# Altium PCB mersad_allah_yari.PcbDoc
Units mm, origin at the board's own origin, x right, y up, seen from the top; angles counter-clockwise.
Board outline 96.65 x 64.52 mm, 2 copper layers (Top Layer, Bottom Layer); 28 components, 23 nets, 116 pads, 13 vias.
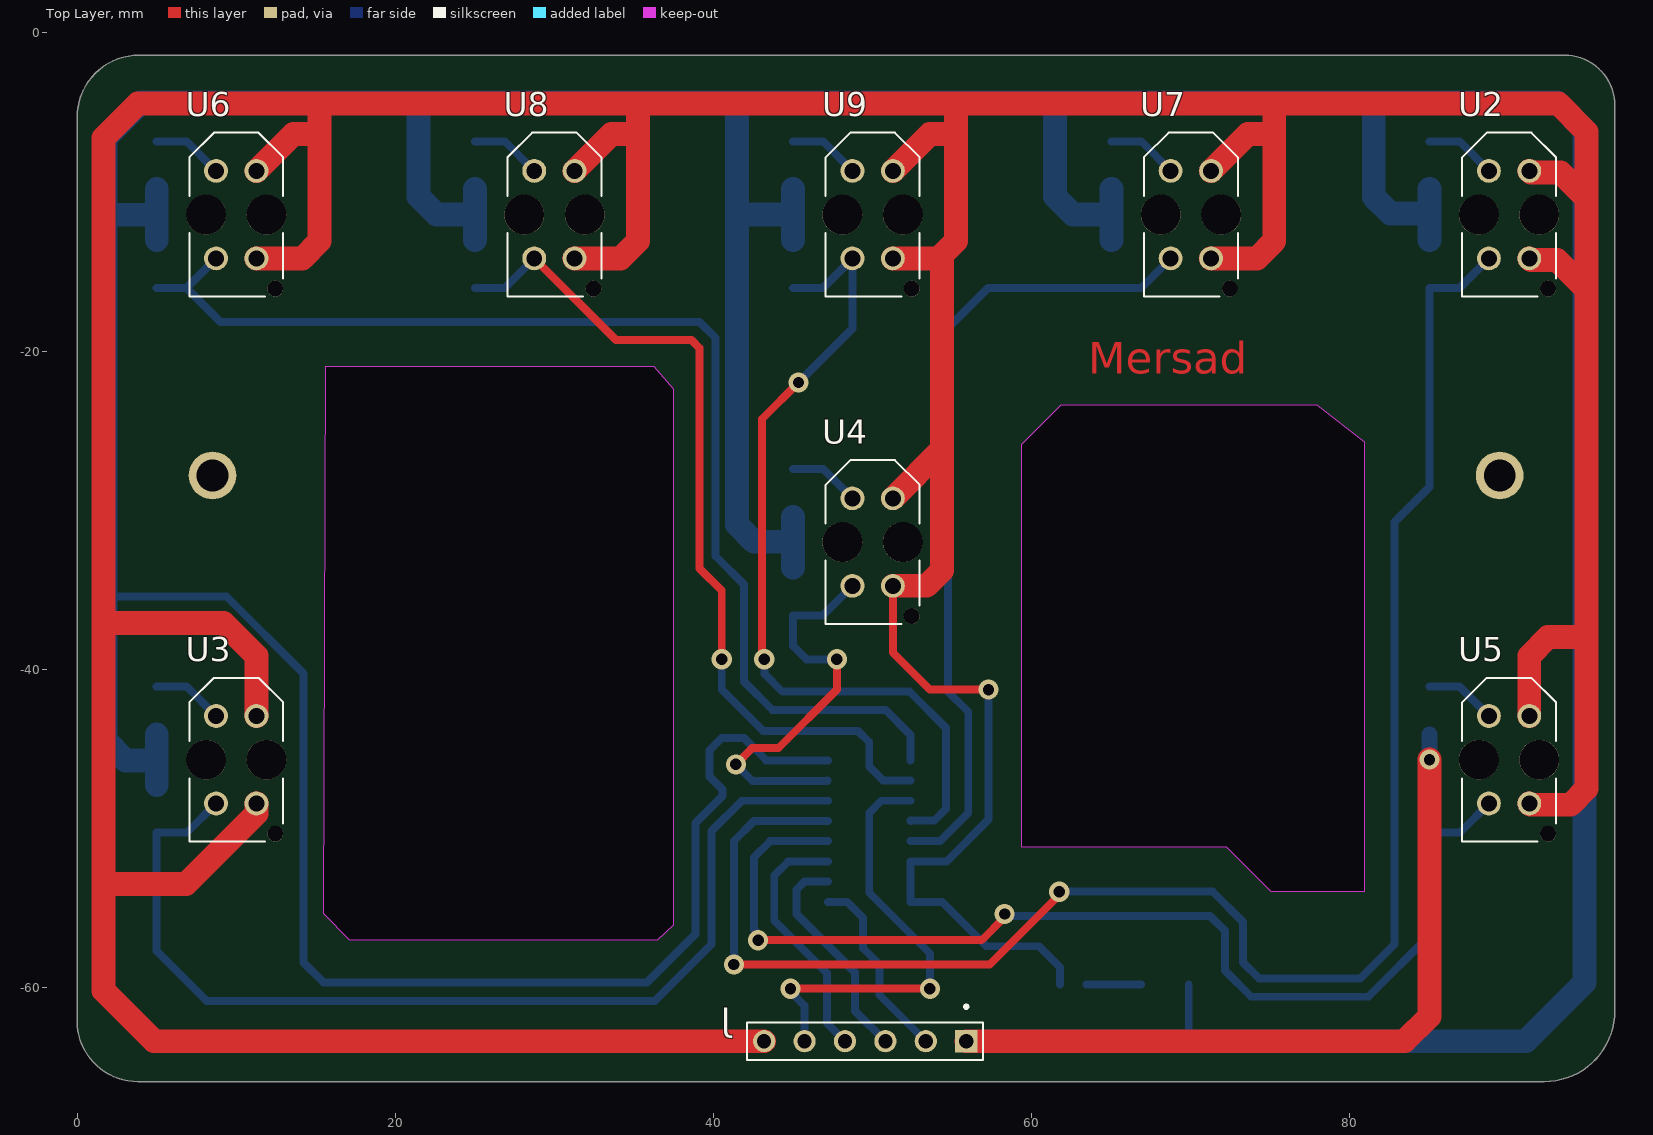
[diagram p0: Top Layer view]
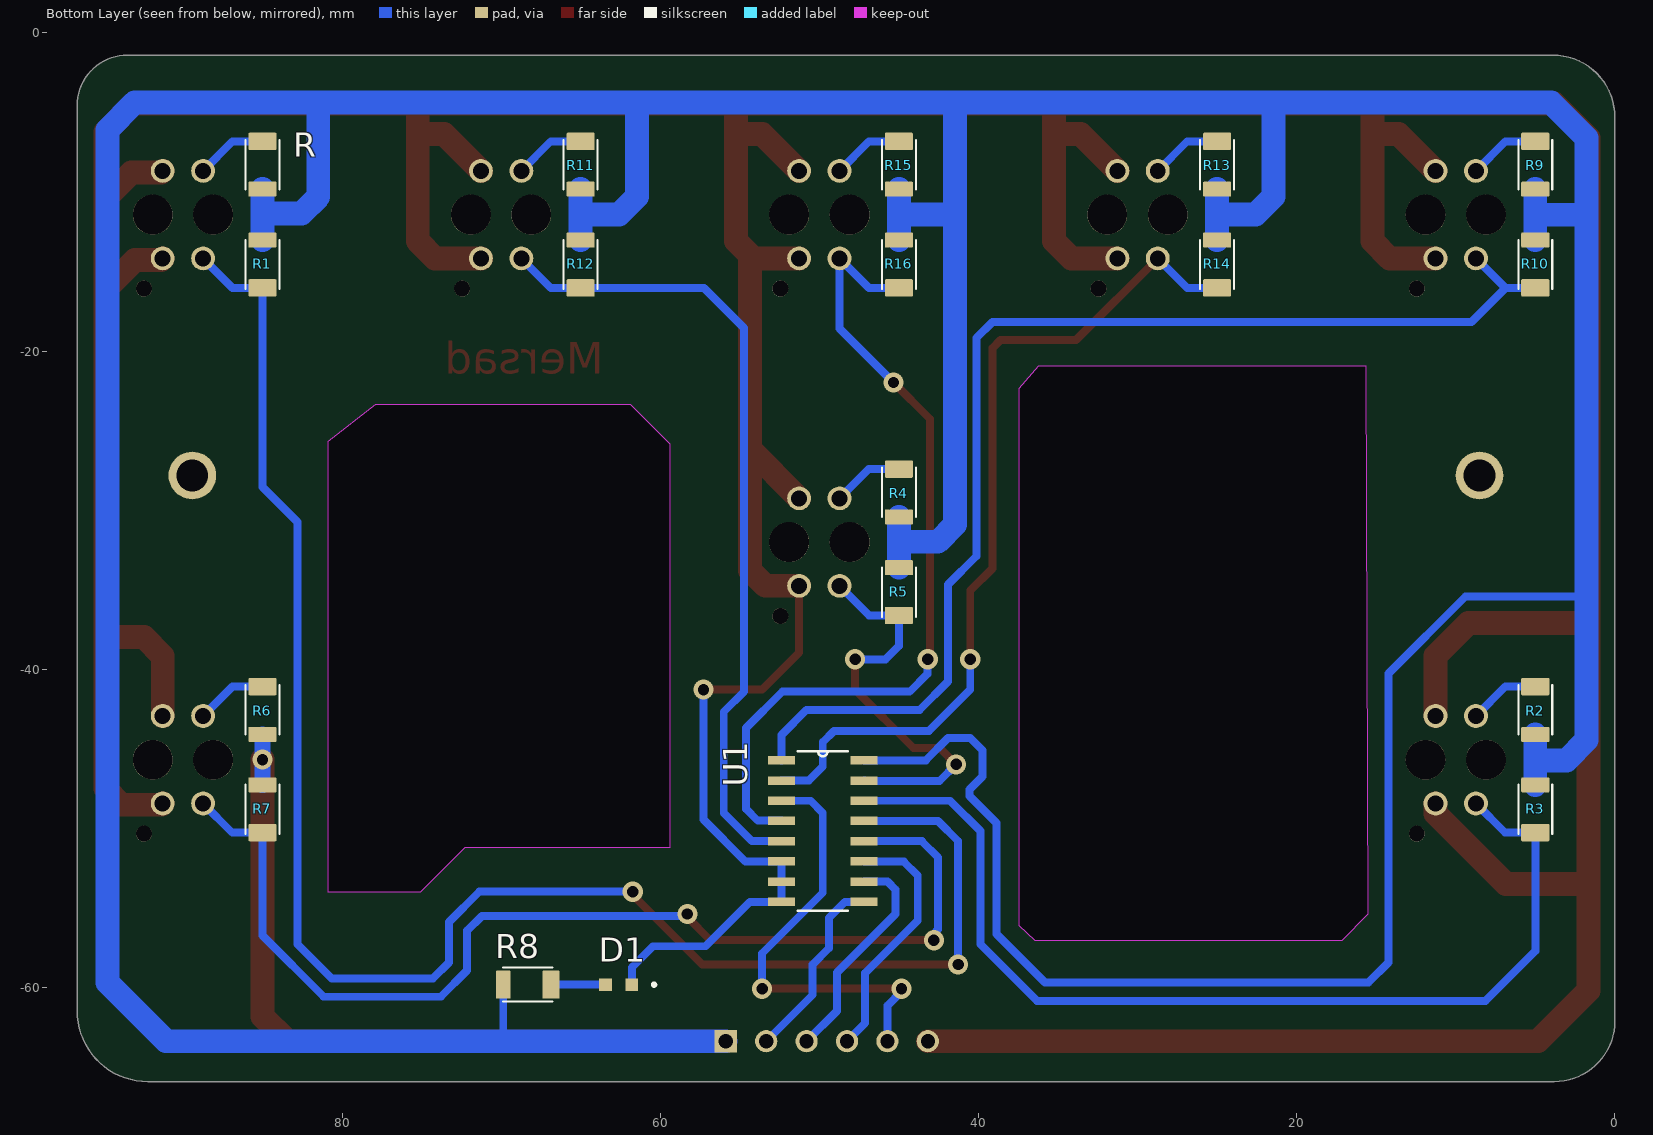
[diagram p1: Bottom Layer view, seen from below]
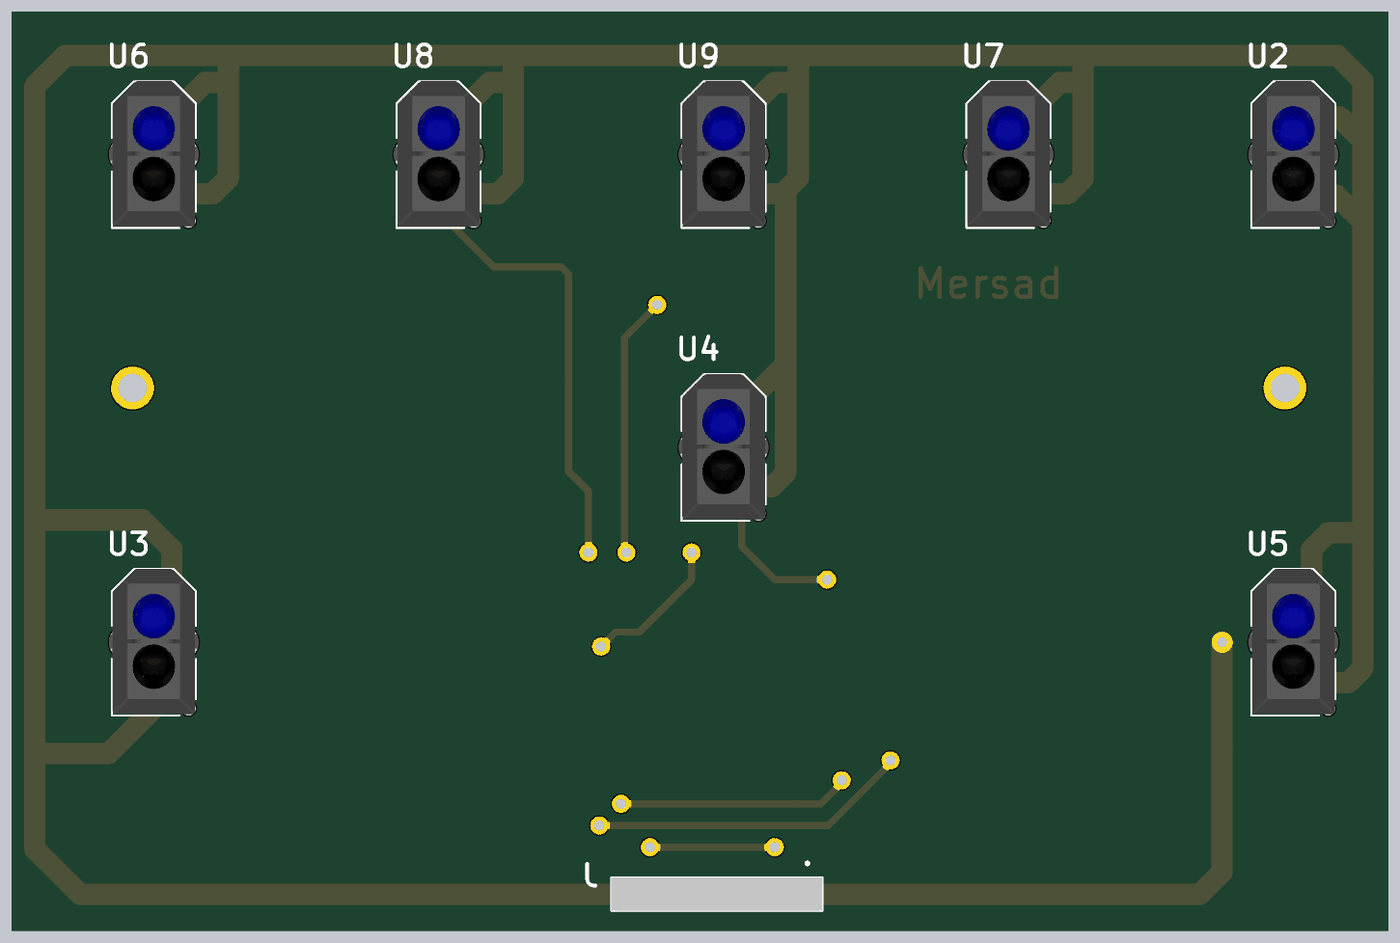
[diagram p2: 3D render of the assembled board from above, using the file's embedded part models]
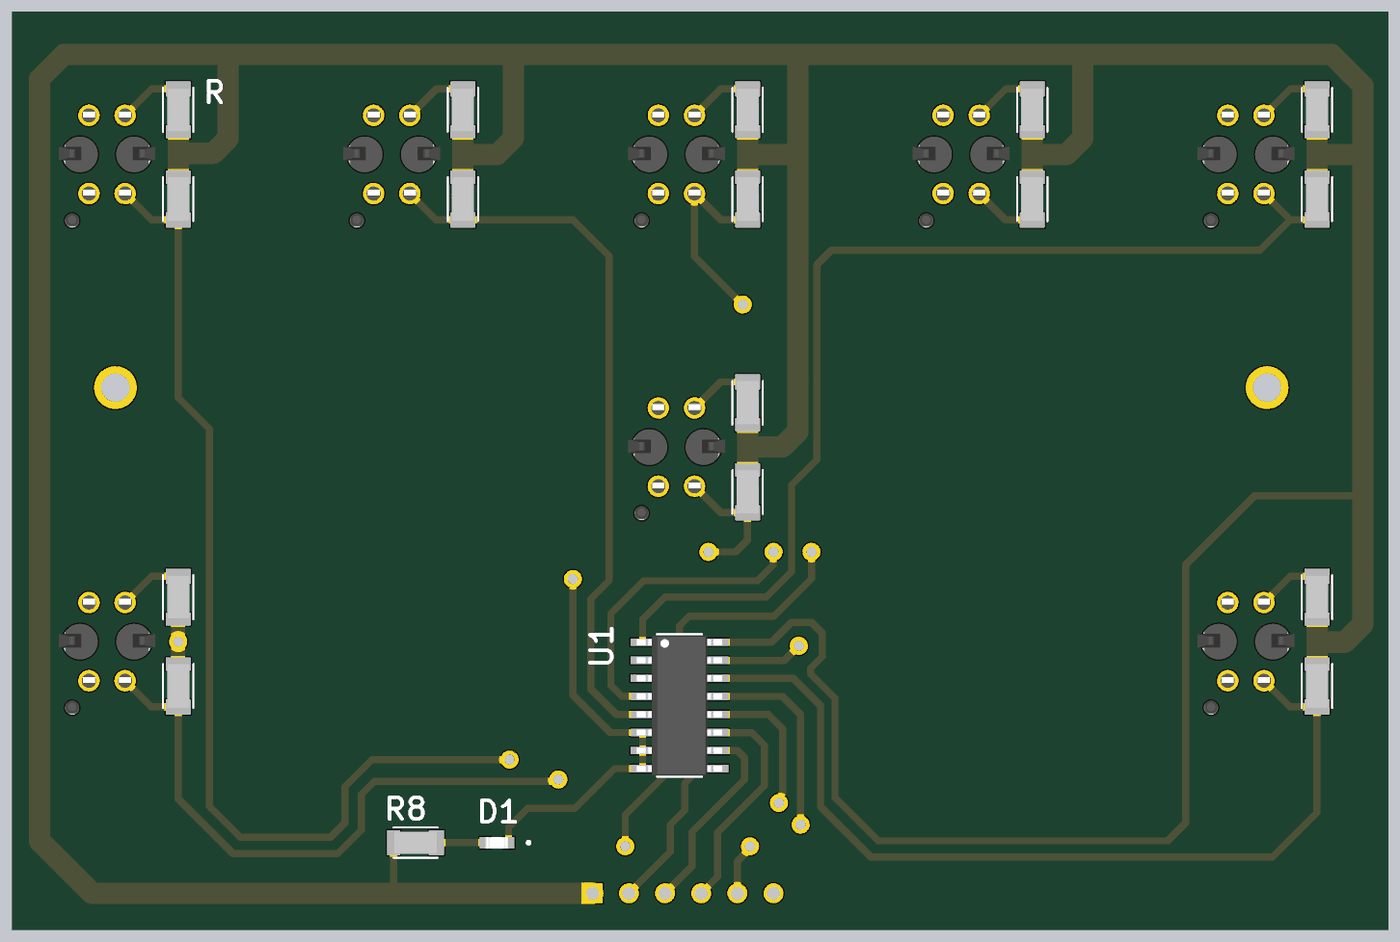
[diagram p3: 3D render of the assembled board from below, using the file's embedded part models]

## Layer stack, top to bottom
Top Solder: solder mask 0.0102, Solder Resist, Dk 3.5
Top Layer: signal copper 0.0356
Dielectric 1: dielectric 0.32, FR-4, Dk 4.8
Bottom Layer: signal copper 0.0356
Bottom Solder: solder mask 0.0102, Solder Resist, Dk 3.5

## Board outline
3.81,-65.913 cw(c3.81,-62.103) 0,-62.103 0,-5.299 cw(c3.902,-5.299) 3.902,-1.397 93.472,-1.397 cw(c93.472,-4.572) 96.647,-4.572 96.647,-61.468 cw(c92.202,-61.468) 92.202,-65.913
cut-out: 59.365,-25.852 61.849,-23.368 77.897,-23.368 80.899,-25.69 80.899,-53.975 75.057,-53.975 72.263,-51.181 59.365,-51.181
cut-out: 37.465,-56.071 36.453,-57.023 17.145,-57.023 15.498,-55.376 15.624,-20.955 36.243,-20.955 37.465,-22.352

## Design rules (kind name [scope] priority, off if disabled: settings)
Clearance [All] p1: gap=0.254 ignorepadtopadclearanceinfootprint=FALSE except(0: Arc-Hole Track-Hole SMDPad-Hole THPad-Hole Via-Hole Fill-Hole Poly-Hole Region-Hole Text-Hole)
PolygonConnect [All] p1: connectstyle=Relief reliefconductorwidth=0.254 reliefentries=4 polygonreliefangle="90 Angle" airgapwidth=0.254
RoutingVias [All] p1: holewidth=0.711 width=1.27 viastyle="Through Hole" minholewidth=0.711 minwidth=1.27 maxholewidth=0.711 maxwidth=1.27
SolderMaskExpansion [All] p1: expansion=0.102 istentingtop=FALSE
Width [All] p1: maxlimit=1.5 minlimit=0.5 preferedwidth=1
30 further rules are at their usual default settings.

## Classes and differential pairs
component class Sheet1: J R R1 R2 R3 R4 R5 R6 R7 R8 R9 R10 R11 R12 R13 R14 R15 R16 U2 U3 U4 U5 U6 U7 U8 U9

## Components (designator, comment, footprint, x,y, rotation, side; value= is the part's Value field where it differs from the comment)
D1 "KPT-1608ZGC" LED_KPT-1608ZGC 62.611,-59.817 r0 bottom
J "103321-6" TE_103321-6 49.53,-63.373 r180 top
R "2-1879462-9" RESC3115X65N 85,-8.28 r270 bottom
R1 "2-1879462-9" RESC3115X65N 85,-14.56 r90 bottom
R2 "2-1879462-9" RESC3115X65N 5,-42.55 r270 bottom
R3 "2-1879462-9" RESC3115X65N 5,-48.8 r90 bottom
R4 "2-1879462-9" RESC3115X65N 45,-28.88 r270 bottom
R5 "2-1879462-9" RESC3115X65N 45,-35.15 r90 bottom
R6 "2-1879462-9" RESC3115X65N 85,-42.55 r270 bottom
R7 "2-1879462-9" RESC3115X65N 85,-48.8 r90 bottom
R8 "2-1879462-9" RESC3115X65N 68.326,-59.817 r0 bottom
R9 "2-1879462-9" RESC3115X65N 5,-8.28 r270 bottom
R10 "2-1879462-9" RESC3115X65N 5,-14.56 r90 bottom
R11 "2-1879462-9" RESC3115X65N 65,-8.28 r270 bottom
R12 "2-1879462-9" RESC3115X65N 65,-14.56 r90 bottom
R13 "2-1879462-9" RESC3115X65N 25,-8.28 r270 bottom
R14 "2-1879462-9" RESC3115X65N 25,-14.56 r90 bottom
R15 "2-1879462-9" RESC3115X65N 45,-8.28 r270 bottom
R16 "2-1879462-9" RESC3115X65N 45,-14.56 r90 bottom
U1 "74HC4051D" SOIC127P600X175-16N 49.784,-50.165 r180 bottom
U2 "TCRT5000" OPTO_TCRT5000 90,-11.42 r90 top
U3 "TCRT5000" OPTO_TCRT5000 10,-45.68 r90 top
U4 "TCRT5000" OPTO_TCRT5000 50,-32 r90 top
U5 "TCRT5000" OPTO_TCRT5000 90,-45.68 r90 top
U6 "TCRT5000" OPTO_TCRT5000 10,-11.42 r90 top
U7 "TCRT5000" OPTO_TCRT5000 70,-11.42 r90 top
U8 "TCRT5000" OPTO_TCRT5000 30,-11.42 r90 top
U9 "TCRT5000" OPTO_TCRT5000 50,-11.42 r90 top

## Footprints (in the part's own frame and the unit in brackets; to place one, negate y for a bottom-side part, rotate by r counter-clockwise, add the part's x,y. Pads: shape width x height; smd on the part's side, far side on the other; paste and mask are expansions set on the pad)
LED_KPT-1608ZGC [mm]
  rect 0.8x0.8 smd: 1(0.825,0) 2(-0.825,0)
  silkscreen extent -2.32,-0.1 -2.12,0.1, body extent -0.8,-0.4 0.8,0.4, height 1.1
OPTO_TCRT5000 [mm]
  round 1.5 hole 1: A(2.75,1.27) CATH(2.75,-1.27) COLL(-2.75,1.27) E(-2.75,-1.27)
  round 1 hole 1 unplated: ""(-4.65,-2.45)
  round 2.5 hole 2.5 unplated: ""(0,1.9) ""(0,-1.9)
  silkscreen extent -5.15,-2.95 5.15,2.95, body extent -5.04,-3.4 5.16,3.4, height 7.2
RESC3115X65N [mm]
  rrect14% 1.09x1.77 smd: 1(-1.465,0)
  rrect14% 0.94x1.77 smd: 2(1.54,0)
  silkscreen extent -1.55,-1.06 1.55,1.06, body extent -1.55,-0.77 1.55,0.77, height 0.56
SOIC127P600X175-16N [mil]
  rect 67x21 smd: 1(-102,175) 2(-102,125) 3(-102,75) 4(-102,25) 5(-102,-25) 6(-102,-75) 7(-102,-125) 8(-102,-175) 9(102,-175) 10(102,-125) 11(102,-75) 12(102,-25) 13(102,25) 14(102,75) 15(102,125) 16(102,175)
  silkscreen extent -62,-197 62,197, body extent -118,-195 118,195, height 69
TE_103321-6 [mm]
  rect 1.398x1.398 hole 0.89: 1(-6.35,0)
  round 1.398 hole 0.89: 2(-3.81,0) 3(-1.27,0) 4(1.27,0) 5(3.81,0) 6(6.35,0)
  silkscreen extent -7.42,-2.27 7.42,1.17, body extent -7.42,-1.17 7.42,1.17, height 10.58

## Part data
D1: "1.6x0.8mm Smd Chip Led Lamp", Package="0603 Kingbright", Availability="In Stock", Check_prices=https://www.snapeda.com/parts/KPT-1608ZGC/Kingbright/view-part/?ref=eda, MF=Kingbright, MP=KPT-1608ZGC, Price=None, SnapEDA_Link=https://www.snapeda.com/parts/KPT-1608ZGC/Kingbright/view-part/?ref=snap
J: "Pin 06 MODII HDR SRST B / A .100CL 6 POS", Package=None, Availability=Unavailable, MF="TE Connectivity", Mouser-Purchase-URL=https://snapeda.com/shop?store=Mouser&id=4238467, MP=103321-6, Price=None, SnapEDA_Link=https://www.snapeda.com/parts/103321-6/TE%20Connectivity/view-part/4238467/?ref=snap
R R1 R2 R3 R4 R5 R6 R7 R8 R9 R10 R11 R12 R13 R14 R15 R16: "RES 0.24 OHM 1% 1/4W 1206", Package=1206, Power_Rating=".25 W", Resistance=24, Tolerance=1%, Availability=Unavailable, EU_RoHS_Compliance="Compliant with Exemptions", MF="TE Connectivity", MP=2-1879462-9, Price=None, SnapEDA_Link=https://www.snapeda.com/parts/2-1879462-9/TE%20Connectivity/view-part/2213899/?ref=snap
U1: "1 Circuit IC Switch 8:1 130Ohm 16-SOIC", Package="SOIC-16 Toshiba", Availability="In Stock", Check_prices=https://www.snapeda.com/parts/74HC4051D/Toshiba/view-part/?ref=eda, MF=Toshiba, MP=74HC4051D, Price=None, Purchase-URL=https://pricing.snapeda.com/search/part/74HC4051D/?ref=eda, SnapEDA_Link=https://www.snapeda.com/parts/74HC4051D/Toshiba/view-part/?ref=snap
U2 U3 U4 U5 U6 U7 U8 U9: "950 nm 60 mA Through Hole Reflective Optical Sensor with Transistor Output", Package=None, Availability=Unavailable, MP=TCRT5000, Price=None

## Free pads (board coordinates)
  round 3 hole 2: 2(8.509,-27.813) 2(89.408,-27.813)

## Via types
v1: diameter 1.27, hole 0.711, Top Layer to Bottom Layer, 13 vias

## Nets (pads, with @x,y where several pads share a name; then routed paths per layer and width w, separated by ;. In a path a pad name is that pad's centre, name@x,y a point inside that pad or via, vN(x,y) a via of type N, cw(c..) or ccw(c..) an arc to the next point about the centre after c; other vN are vias at no path point)
+5: J.1 R1.2 R2.2 R3.2 R4.2 R5.2 R6.2 R7.2 R8.2 R9.2 R10.2 R11.2 R12.2 R13.2 R14.2 R15.2 R16.2 R.2 U1.16 | length 452.1
  Top Layer w1.5: J.1 83.439,-63.373 85,-61.812 v1(85,-45.675)
  Bottom Layer w0.5: 1.778,-35.433 9.398,-35.433 14.224,-40.259 14.224,-58.42 15.494,-59.69 35.814,-59.69 38.862,-56.642 38.862,-49.657 40.56,-47.959 40.56,-47.545 39.751,-46.736 39.751,-45.085 40.513,-44.323 41.91,-44.323 43.307,-45.72 U1.16 ; 69.866,-63.357 R8.2
  Bottom Layer w1: R7.2 v1(85,-45.675) R6.2
  Bottom Layer w1.5: R3.2 5,-45.675 ; R2.2 5,-45.675 ; R10.2 5,-11.42 ; R9.2 5,-11.42 ; R14.2 25,-11.42 ; R13.2 25,-11.42 ; R5.2 45,-31.983 ; R4.2 45,-31.983 ; R16.2 45,-11.42 ; R15.2 45,-11.42 ; J.1 69.85,-63.373 ; R12.2 65,-11.42 ; R11.2 65,-11.42 ; 69.866,-63.357 69.85,-63.373 ; 81.492,-4.391 81.492,-10.297 82.535,-11.34 85,-11.34 ; R1.2 85,-11.34 ; R.2 85,-11.34 ; 1.778,-11.43 1.778,-35.433 1.778,-44.45 3.048,-45.72 4.955,-45.72 5,-45.675 ; 1.778,-11.43 1.778,-6.604 4,-4.381 21.463,-4.381 ; 1.778,-11.43 4.99,-11.43 5,-11.42 ; 21.463,-4.381 41.463,-4.381 ; 21.463,-4.381 21.463,-10.287 22.596,-11.42 25,-11.42 ; 41.463,-11.43 41.463,-4.381 ; 41.463,-11.43 41.463,-30.892 42.554,-31.983 45,-31.983 ; 41.463,-11.43 41.473,-11.42 45,-11.42 ; 41.463,-4.381 61.463,-4.381 ; 61.463,-4.381 93.027,-4.381 94.742,-6.096 94.742,-59.69 91.059,-63.373 69.85,-63.373 ; 61.463,-4.381 61.463,-10.287 62.596,-11.42 65,-11.42
GND: D1.2 J.6 U1.6 U1.7 U1.8 U2.CATH U2.E U3.CATH U3.E U4.CATH U4.E U5.CATH U5.E U6.CATH U6.E U7.CATH U7.E U8.CATH U8.E U9.CATH U9.E | length 419.3
  Top Layer w0.5: U4.E 51.27,-38.951 53.594,-41.275 v1(57.277,-41.275)
  Top Layer w1.5: U3.E 11.27,-49.055 6.831,-53.494 1.651,-53.494 ; U3.CATH 11.27,-39.149 9.205,-37.084 1.651,-37.084 ; U6.E 14.151,-14.17 15.24,-13.081 15.24,-6.35 ; U6.CATH 13.59,-6.35 15.24,-6.35 ; U8.E 34.151,-14.17 35.24,-13.081 35.24,-6.35 ; U8.CATH 33.59,-6.35 35.24,-6.35 ; J.6 4.826,-63.373 1.651,-60.198 1.651,-53.494 ; U4.E 53.388,-34.75 54.356,-33.782 54.356,-26.164 ; U4.CATH 54.356,-26.164 ; U9.E 54.151,-14.17 54.356,-13.965 ; U9.CATH 53.59,-6.35 55.24,-6.35 ; U7.E 74.151,-14.17 75.24,-13.081 75.24,-6.35 ; U7.CATH 73.59,-6.35 75.24,-6.35 ; U5.E 91.354,-48.514 93.853,-48.514 94.869,-47.498 94.869,-37.973 ; U5.CATH 91.27,-39.159 92.456,-37.973 94.869,-37.973 ; U2.E 91.366,-14.266 93.006,-14.266 94.869,-16.129 ; U2.CATH 91.366,-8.766 93.221,-8.766 94.869,-10.414 ; 94.835,-8.67 94.869,-8.636 ; 1.651,-53.494 1.651,-37.084 ; 1.651,-37.084 1.651,-6.604 3.81,-4.445 15.24,-4.445 ; 15.24,-6.35 15.24,-4.445 ; 15.24,-4.445 35.24,-4.445 ; 35.24,-6.35 35.24,-4.445 ; 35.24,-4.445 55.24,-4.445 ; 54.356,-26.164 54.356,-13.965 ; 54.356,-13.965 55.24,-13.081 55.24,-6.35 ; 55.24,-6.35 55.24,-4.445 ; 55.24,-4.445 75.24,-4.445 ; 75.24,-6.35 75.24,-4.445 ; 75.24,-4.445 93.091,-4.445 94.869,-6.223 94.869,-8.636 ; 94.869,-37.973 94.869,-16.129 ; 94.869,-16.129 94.869,-10.414 ; 94.869,-10.414 94.869,-8.636
  Bottom Layer w0.5: v1(57.277,-41.275) 57.277,-49.443 54.65,-52.07 U1.6 U1.7 U1.8 54.356,-54.61 57.15,-57.404 60.452,-57.404 61.786,-58.738 D1.2
NetD1_1: D1.1 R8.1 | length 3.4
  Bottom Layer w0.5: D1.1 R8.1
NetR2_1: R2.1 U3.A | length 4.5
  Bottom Layer w0.5: R2.1 6.885,-41.085 U3.A
NetR4_1: R4.1 U4.A | length 4.5
  Bottom Layer w0.5: R4.1 46.895,-27.415 U4.A
NetR6_1: R6.1 U5.A | length 4.5
  Bottom Layer w0.5: R6.1 86.885,-41.085 U5.A
NetR9_1: R9.1 U6.A | length 4.5
  Bottom Layer w0.5: R9.1 6.875,-6.815 U6.A
NetR11_1: R11.1 U7.A | length 4.5
  Bottom Layer w0.5: R11.1 66.875,-6.815 U7.A
NetR13_1: R13.1 U8.A | length 4.5
  Bottom Layer w0.5: R13.1 26.875,-6.815 U8.A
NetR15_1: R15.1 U9.A | length 4.5
  Bottom Layer w0.5: R15.1 46.875,-6.815 U9.A
NetR_1: R.1 U2.A | length 4.5
  Bottom Layer w0.5: R.1 86.875,-6.815 U2.A
OUT: J.5 U1.3 | length 28
  Top Layer w0.5: v1(44.831,-60.071) v1(53.594,-60.071)
  Bottom Layer w0.5: v1(44.831,-60.071) 44.831,-60.252 45.72,-61.141 J.5 ; U1.3 50.546,-48.26 49.784,-49.022 49.784,-54.037 53.594,-57.847 v1(53.594,-60.071)
S0: J.4 U1.11 | length 16
  Bottom Layer w0.5: U1.11 47.176,-52.087 44.687,-52.087 43.815,-52.959 43.815,-55.789 47.117,-59.091 47.117,-62.23 J.4
S1: J.3 U1.10 | length 14
  Bottom Layer w0.5: U1.10 45.72,-53.34 45.212,-53.848 45.212,-55.372 48.895,-59.055 48.895,-61.468 J.3
S2: J.2 U1.9 | length 12
  Bottom Layer w0.5: U1.9 48.387,-54.61 49.403,-55.626 49.403,-57.531 50.419,-58.547 50.419,-60.452 J.2
Y0: R1.1 U1.13 U2.COLL | length 109
  Top Layer w0.5: v1(41.275,-58.547) 57.358,-58.547 61.722,-54.183 v1(61.722,-53.975)
  Bottom Layer w0.5: v1(41.275,-58.547) 41.275,-50.8 42.545,-49.53 U1.13 ; v1(61.722,-53.975) 71.374,-53.975 73.279,-55.88 73.279,-58.42 74.295,-59.436 80.645,-59.436 82.804,-57.277 82.804,-30.734 85,-28.538 R1.1 86.875,-16.025 U2.COLL
Y1: R3.1 U1.14 U3.COLL | length 64.8
  Bottom Layer w0.5: U3.COLL 6.895,-50.265 R3.1 5,-57.705 8.128,-60.833 36.322,-60.833 39.878,-57.277 39.878,-50.165 41.783,-48.26 U1.14
Y2: R5.1 U1.15 U4.COLL | length 25.9
  Top Layer w0.5: v1(41.402,-45.974) 42.418,-44.958 44.069,-44.958 47.752,-41.275 v1(47.752,-39.37)
  Bottom Layer w0.5: v1(41.402,-45.974) 42.435,-47.007 47.135,-47.007 U1.15@47.169,-46.973 ; v1(47.752,-39.37) 45.847,-39.37 45,-38.523 R5.1 46.865,-36.615 U4.COLL
Y3: R7.1 U1.12 U5.COLL | length 69.6
  Top Layer w0.5: v1(42.799,-57.023) 56.85,-57.023 58.293,-55.58 v1(58.293,-55.372)
  Bottom Layer w0.5: v1(42.799,-57.023) 42.652,-56.876 42.652,-56.452 42.545,-56.345 42.545,-51.816 43.561,-50.8 U1.12 ; v1(58.293,-55.372) 58.42,-55.499 71.208,-55.499 72.136,-56.427 72.136,-58.928 73.787,-60.579 81.153,-60.579 85,-56.732 R7.1 86.895,-50.265 U5.COLL
Y4: R10.1 U1.1 U6.COLL | length 74.8
  Bottom Layer w0.5: R10.1 6.875,-16.025 ; U6.COLL 6.875,-16.025 ; U1.1 52.375,-44.12 50.8,-42.545 43.688,-42.545 41.91,-40.767 41.91,-34.671 40.132,-32.893 40.132,-19.177 39.116,-18.161 9.011,-18.161 6.875,-16.025
Y5: R12.1 U1.5 U7.COLL | length 51.2
  Bottom Layer w0.5: U1.5 54.229,-50.8 56.007,-49.022 56.007,-42.672 54.737,-41.402 54.737,-18.542 57.254,-16.025 R12.1 66.875,-16.025 U7.COLL
Y6: R14.1 U1.2 U8.COLL | length 54.4
  Top Layer w0.5: U8.COLL 33.864,-19.304 38.608,-19.304 39.116,-19.812 39.116,-33.655 40.513,-35.052 v1(40.513,-39.37)
  Bottom Layer w0.5: R14.1 26.875,-16.025 U8.COLL ; v1(40.513,-39.37) 40.513,-41.275 43.116,-43.878 49.085,-43.878 49.784,-44.577 49.784,-46.101 50.656,-46.973 52.358,-46.973 U1.2
Y7: R16.1 U1.4 U9.COLL | length 53.5
  Top Layer w0.5: v1(43.18,-39.37) 43.053,-39.243 43.053,-24.257 v1(45.339,-21.971)
  Bottom Layer w0.5: v1(43.18,-39.37) 43.215,-39.405 43.215,-40.294 44.323,-41.402 52.324,-41.402 54.61,-43.688 54.61,-48.768 53.865,-49.513 52.392,-49.513 U1.4 ; R16.1 46.875,-16.025 U9.COLL 48.73,-18.58 v1(45.339,-21.971)
pads on no net: U2. U3. U4. U5. U6. U7. U8. U9.

## Other copper
Top Layer:
  text "Mersad" at 63.55,-21.417 h2